# Altium PCB UpperAvi2.PcbDoc
Units mil, origin at the board's own origin, x right, y up, seen from the top; angles counter-clockwise.
Board outline 4760 x 3145 mil, 4 copper layers (Top Layer, Layer 1, Layer 2, Bottom Layer), stack 54.2 mil thick; 15 components, 5 nets, 37 pads, 3 vias.
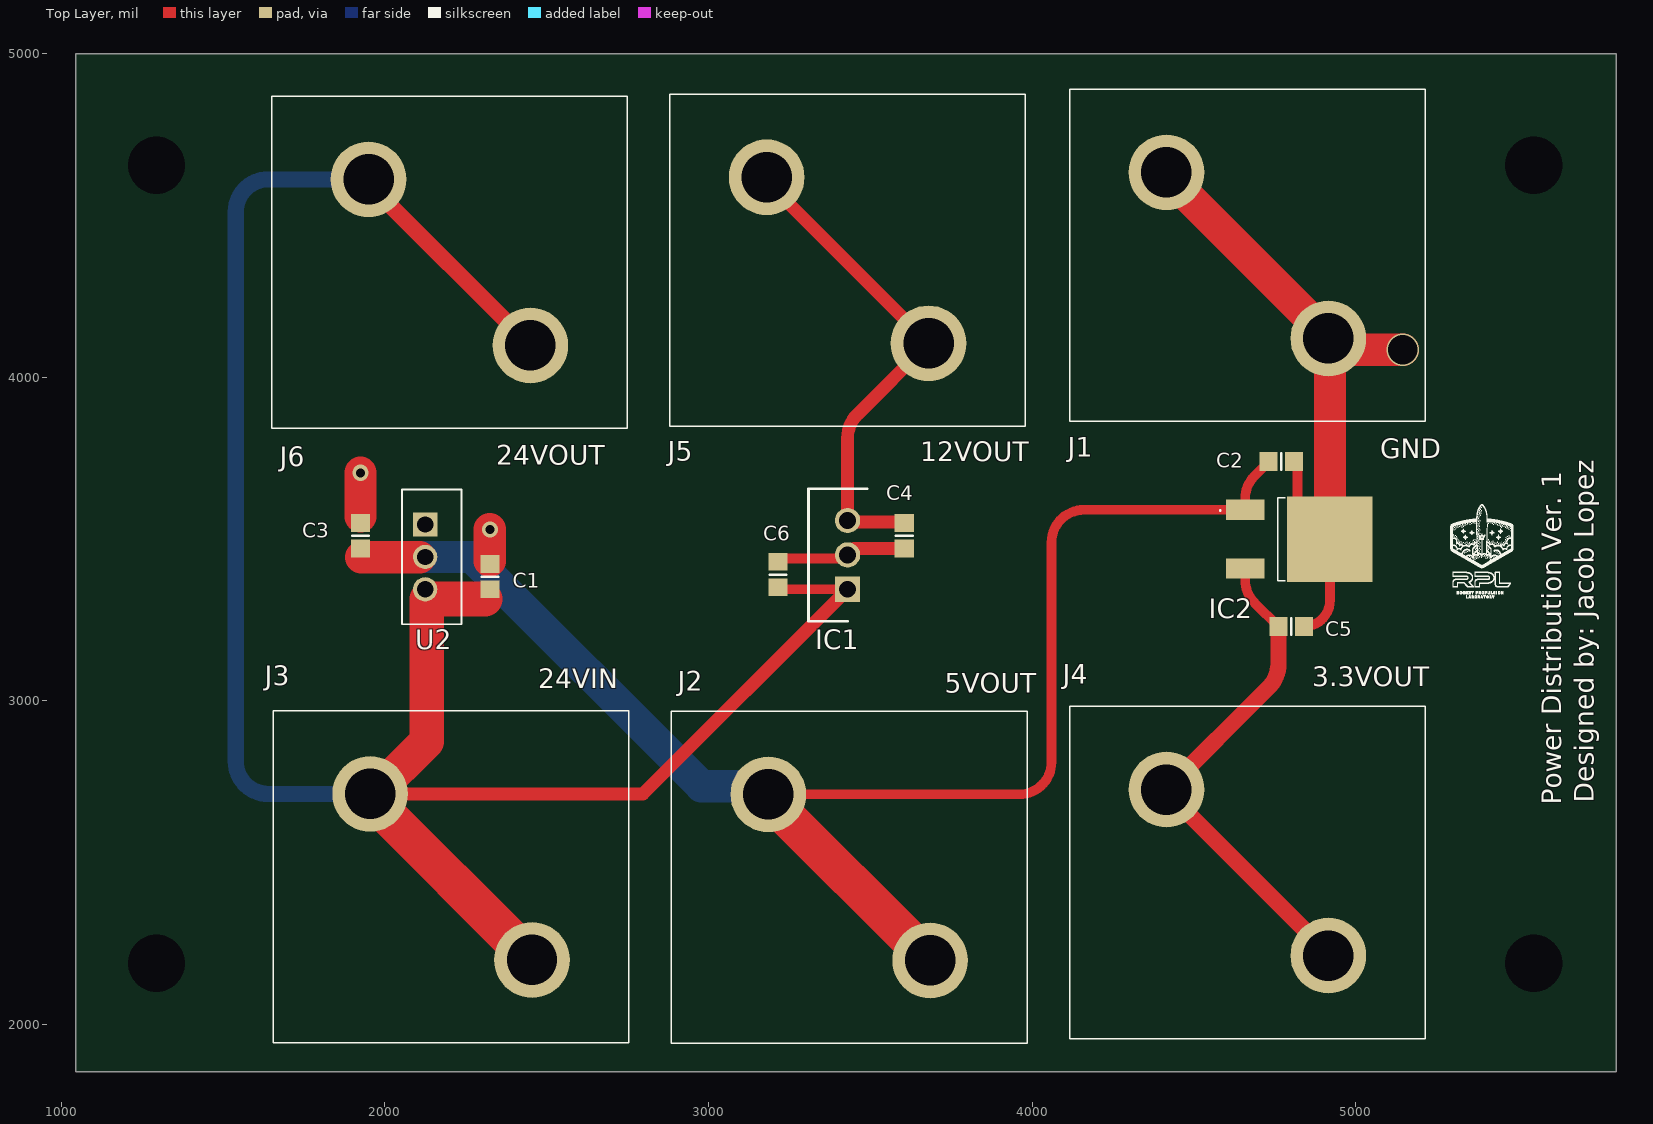
[diagram p0: Top Layer view]
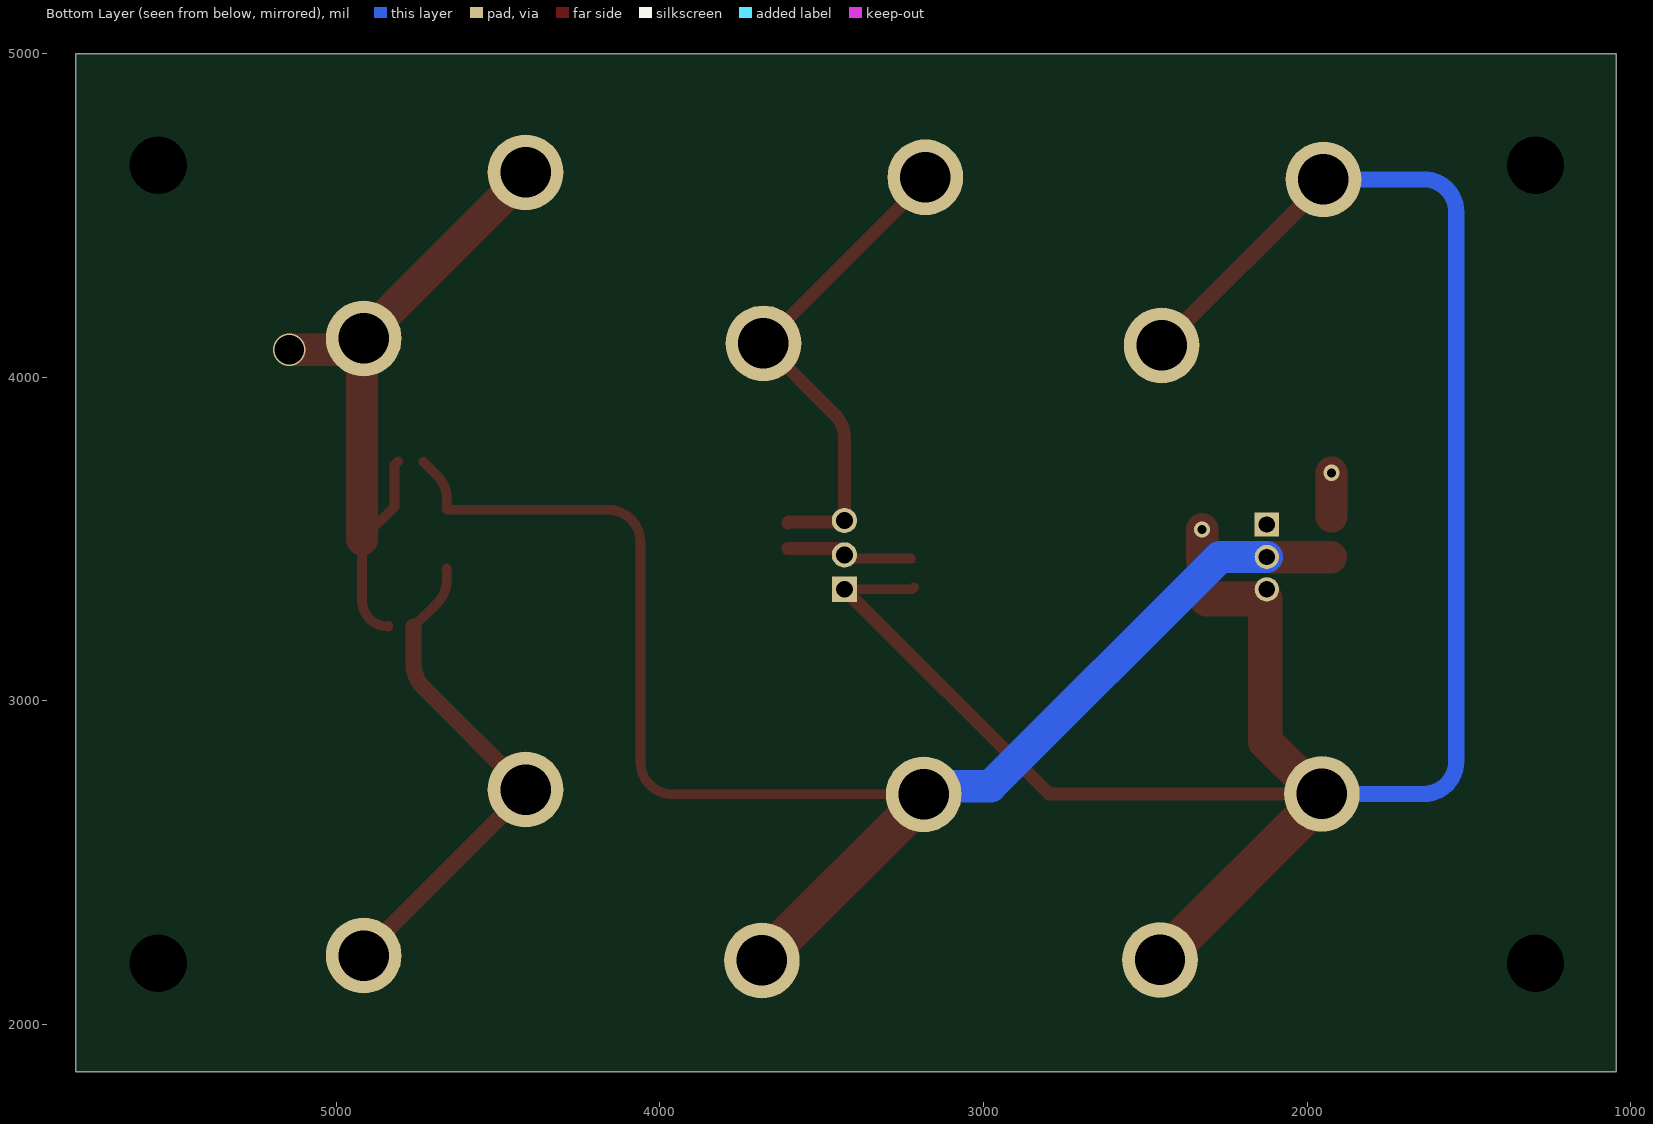
[diagram p1: Bottom Layer view, seen from below]
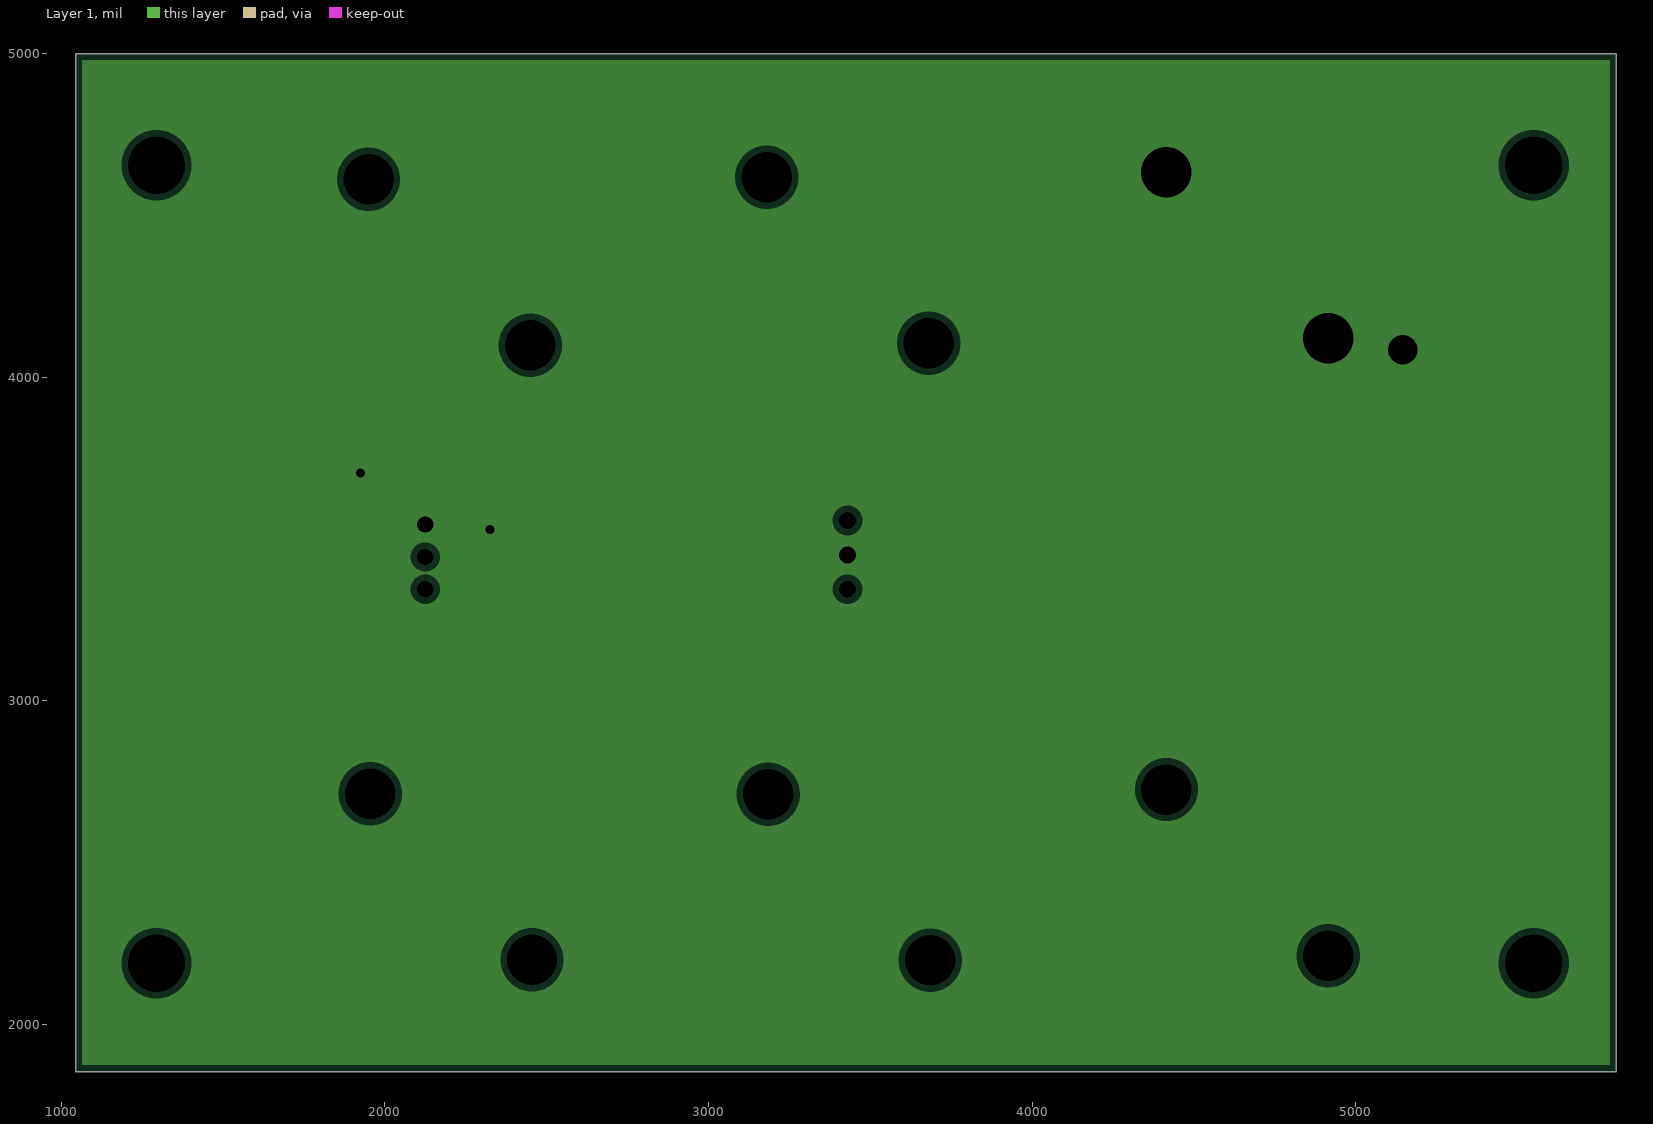
[diagram p2: Layer 1, clearances drawn from the general rule]
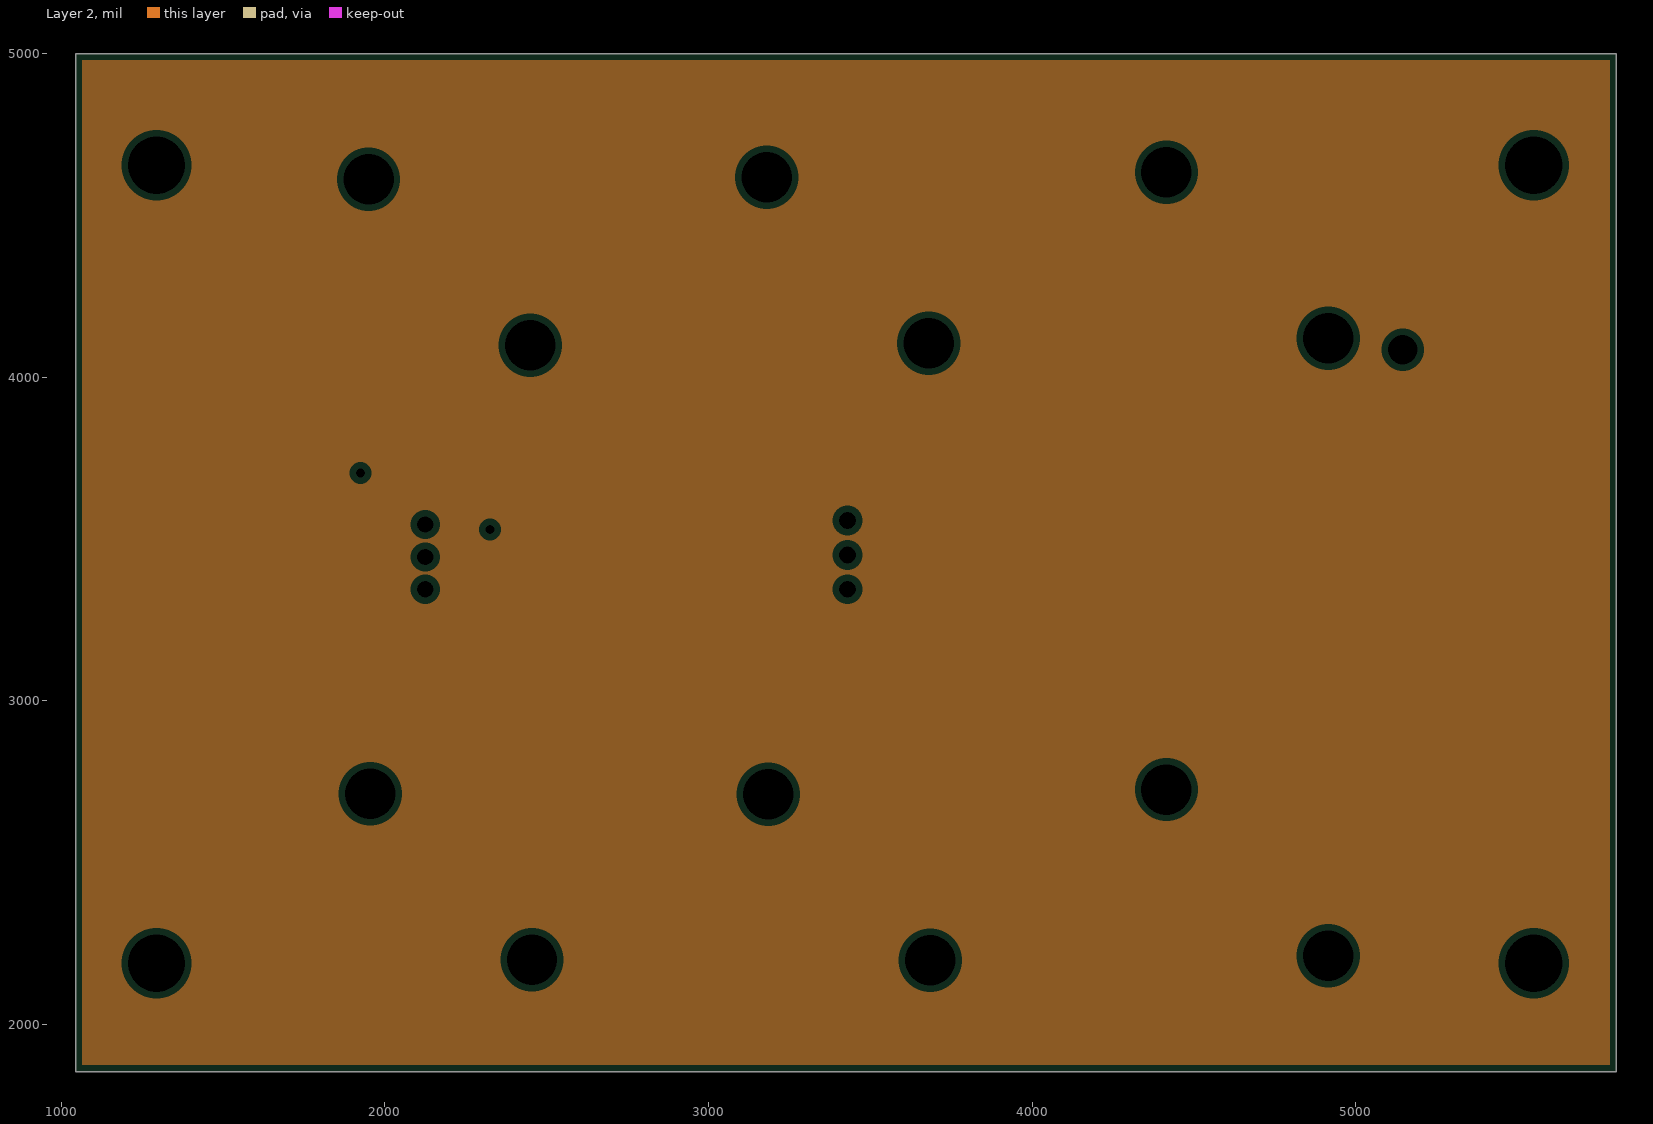
[diagram p3: Layer 2, clearances drawn from the general rule]

## Layer stack, top to bottom
Top Solder: solder mask 0.4, Solder Resist, Dk 3.5
Top Layer: signal copper 9
Dielectric 2: prepreg 2.8, PP-006, Dk 4.1
Layer 1: plane copper 9, net GND
Dielectric 1: dielectric 12.6, FR-4, Dk 4.8
Layer 2: plane copper 9
Dielectric 3: prepreg 2.8, PP-006, Dk 4.1
Bottom Layer: signal copper 9
Bottom Solder: solder mask 0.4, Solder Resist, Dk 3.5

## Board outline
1045,1855 5805,1855 5805,5000 1045,5000

## Design rules (kind name [scope] priority, off if disabled: settings)
Clearance [All] p1: gap=10 ignorepadtopadclearanceinfootprint=FALSE except(0: Arc-Hole Track-Hole SMDPad-Hole THPad-Hole Via-Hole Fill-Hole Poly-Hole Region-Hole Text-Hole)
PlaneClearance [All] p1: clearance=20
PlaneConnect [All] p1: planeconnectstyle=Relief reliefexpansion=20 reliefentries=4 reliefconductorwidth=10 reliefairgap=10
PolygonConnect [All] p1: connectstyle=Relief reliefconductorwidth=10 reliefentries=4 polygonreliefangle="90 Angle" airgapwidth=10
RoutingVias [All] p1: holewidth=28 width=50 viastyle="Through Hole" minholewidth=28 minwidth=50 maxholewidth=28 maxwidth=50
SolderMaskExpansion [All] p1: expansion=4
Width [All] p1: maxlimit=200 minlimit=10 preferedwidth=10 minimp=50.000000 maximp=50.000000 favimp=50.000000
28 further rules are at their usual default settings.

## Components (designator, comment, footprint, x,y, rotation, side; value= is the part's Value field where it differs from the comment)
C1 "10uF" 6-0805_M 2325,3384.33 r90 top
C2 ".1uF" 6-0805_M 4769.37,3740 r0 top
C3 "10uF" 6-0805_M 1925,3510 r90 top
C4 ".1uF" 6-0805_M 3605,3510 r270 top
C5 "2.2uF" 6-0805_M 4800,3230 r0 top
C6 ".33uF" 6-0805_M 3215,3390.63 r90 top
IC1 "L78S12CV-12" TO270P460X1020X2008-3P 3430,3344.96 r90 top
IC2 "LF33CDT-TRY" LD1117DT33 4789.09,3500 r180 top
J1 "038660-8802" 0386608802 4665,4376.5 r180 top
J2 "038660-8802" 0386608802 3435,2455 r0 top
J3 "038660-8802" 0386608802 2205,2456.5 r0 top
J4 "038660-8802" 0386608802 4665,2470 r180 top
J5 "038660-8802" 0386608802 3430,4361.5 r0 top
J6 "038660-8802" 0386608802 2200,4355 r0 top
U2 "LM1084IT-5.0" *TO254P470X1016X2222-3P 2165,3345 r270 top

## Footprints (in the part's own frame and the unit in brackets; to place one, negate y for a bottom-side part, rotate by r counter-clockwise, add the part's x,y. Pads: shape width x height; smd on the part's side, far side on the other; paste and mask are expansions set on the pad)
6-0805_M [mm] "Chip Resistor, Body 2.0x1.2mm, IPC Low Density"
  rect 1.4x1.5 smd: 1(-1,0) 2(1,0)
  silkscreen extent 0,-0.65 0,0.65, body extent -1.07,-0.7 1.07,0.7, height 0.7
0386608802 [mm]
  round 5.94 hole 3.96: 1(-6.35,6.515) 2(6.35,-6.515)
  silkscreen extent -13.95,-13.03 13.95,13.03, body extent -13.95,-13.03 13.95,13.03, height 21
*TO254P470X1016X2222-3P [mil]
  rect 75x75 hole 50: 1(-200,-40)
  round 75 hole 50: 2(-100,-40) 3(0,-40)
  silkscreen extent -308,-112 108,72
LD1117DT33 [mm]
  rect 3x1.6 smd: 1(3.325,-2.3) 2(3.325,2.3)
  rect 6.7x6.7 smd: 3(-3.325,0)
  silkscreen extent 0.18,-3.25 5.32,3.25
TO270P460X1020X2008-3P [mm]
  rect 1.98x1.98 hole 1.32: 1(0,0)
  round 1.98 hole 1.32: 2(2.7,0) 3(5.4,0)
  silkscreen extent -2.5,-1.53 7.9,3.07, body extent -2.4,-1.53 7.8,3.07, height 19.21

## Part data
C1 C2 C3 C4 C5 C6: library part CC0603KRX7R9BB104, "0603 0.1 uF 50 V ±10 % Tolerance X7R SMT Multilayer Ceramic Capacitor", Package="0603 Yageo", Availability=Unavailable, MF=Yageo, MP=CC0603KRX7R9BB104, Price=None, SnapEDA_Link=https://www.snapeda.com/parts/CC0603KRX7R9BB104/Yageo/view-part/?ref=snap
IC1: library part L78S12CV, "Integrated Circuit", Manufacturer_Name=STMicroelectronics, Mouser Part Number=511-L78S12CV, Datasheet Link=https://componentsearchengine.com/Datasheets/1/L78S12CV.pdf, Height=4.6mm, Manufacturer_Part_Number=L78S12CV, Mouser Price/Stock=https://www.mouser.com/Search/Refine.aspx?Keyword=511-L78S12CV
IC2: "Integrated Circuit", Manufacturer_Name=STMicroelectronics, Mouser Part Number=511-LF33CDT-TRY, Datasheet Link=https://componentsearchengine.com/Datasheets/1/LF33CDT-TRY.pdf, Height=2mm, Manufacturer_Part_Number=LF33CDT-TRY, Mouser Price/Stock=https://www.mouser.com/Search/Refine.aspx?Keyword=511-LF33CDT-TRY
J1 J2 J3 J4 J5 J6: "Connector", Manufacturer_Name=Molex, Datasheet Link=https://www.molex.com/pdm_docs/sd/386608802_sd.pdf, Height=21mm, Manufacturer_Part_Number=038660-8802
U2: "Voltage stabiliser; LDO, fixed; 5V; 5A; TO220; THT; 1.2", Package="TO-220 Texas Instruments", Availability=Unavailable, MF="Texas Instruments", MP=LM1084IT-5.0/NOPB, Price=None, SnapEDA_Link=https://www.snapeda.com/parts/LM1084IT-5.0/NOPB/Texas%20Instruments/view-part/?ref=snap

## Free pads (board coordinates)
  round 60 hole 177.16: 2(1295,2190) 2(1295,4655) 2(5550,2190) 2(5550,4655)

## Via types
v1: diameter 50, hole 28, Top Layer to Bottom Layer, 2 vias
v2: diameter 100, hole 90, Top Layer to Bottom Layer, 1 vias

## Nets (pads, with @x,y where several pads share a name; then routed paths per layer and width w, separated by ;. In a path a pad name is that pad's centre, name@x,y a point inside that pad or via, vN(x,y) a via of type N, cw(c..) or ccw(c..) an arc to the next point about the centre after c; other vN are vias at no path point)
3.3VOUT: C5.1 IC2.2 J4.1 J4.2 | length 1592.4
  Top Layer w10: IC2.2 IC2.2@4670.55,3409.45
  Top Layer w30: J4.2@4415,2720 J4.2 ; IC2.2 4658.19,3373.86 ccw(c4758.19,3373.86) 4687.48,3303.15 C5.1 ; J4.1 J4.1@4915,2220
  Top Layer w50: J4.2@4415,2720 J4.1@4915,2220 ; J4.2 4731.34,3042.84 ccw(c4660.63,3113.55) 4760.63,3113.55 C5.1
5VOUT: C2.1 C3.1 IC2.1 J2.1 J2.2 U2.2 | length 4705.2
  Top Layer w10: C2.1@4730,3738.03 C2.1
  Top Layer w30: J2.1@3185,2698.5 J2.1 3960,2711.5 ccw(c3960,2811.5) 4060,2811.5 4060,3490.55 cw(c4160,3490.55) 4160,3590.55 IC2.1 4658.19,3624.8 cw(c4758.19,3624.8) 4687.48,3695.51 C2.1@4730,3738.03
  Top Layer w100: C3.1@1927.99,3444.45 U2.2@2107.99,3444.45
  Top Layer w120: J2.1@3185,2698.5 J2.2
  Bottom Layer w100: U2.2 2270.14,3445 2978.03,2737.11 3159.39,2737.11 J2.1
12VOUT: C4.1 IC1.3 J5.1 J5.2 | length 1525
  Top Layer w40: J5.1 3180,4605 J5.2 3459.29,3884.29 ccw(c3530,3813.58) 3430,3813.58 IC1.3 ; IC1.3@3448.46,3553.46 3600.91,3553.46 C4.1
GND: C1.2 C2.2 C3.2 C4.2 C5.2 C6.2 IC1.2 IC2.3 J1.1 J1.2 U2.1 | length 2803.1
  Top Layer w10: C6.2 C6.2@3225,3440
  Top Layer w30: C6.2@3225,3440 3418.74,3440 IC1.2 ; J1.2@4480,4560 J1.2@4480,4632.99 ; C2.2 4820,3728.74 4820,3600 IC2.3 4920,3310.63 cw(c4839.37,3310.63) C5.2 C5.2@4839.37,3231.97 ; J1.1 J1.1@4920,4115 ; J1.1@4920,4120 J1.1@4920,4115 ; J1.1@4950,4085 J1.1@4920,4115
  Top Layer w40: IC1.2 3449.37,3470.63 C4.2
  Top Layer w100: C3.2@1925,3570 v1(1925,3705) ; C1.2@2325,3432.52 v1(2325,3530) ; J1.2@4480,4560 J1.1@4920,4120 ; IC2.3 J1.1@4920,4115 ; J1.1@4950,4085 v2(5145,4085)
Input24V: C1.1 C6.1 IC1.1 J3.1 J3.2 J6.1 J6.2 U2.3 | length 6894.3
  Top Layer w30: J3.1@1955,2700 J3.1 ; C6.1 3221.3,3344.96 IC1.1
  Top Layer w40: J3.1@1967.99,2712.99 2798.03,2712.99 IC1.1
  Top Layer w50: J6.1 1950,4598.5 J6.2
  Top Layer w107: J3.1 1967.99,2712.99 2130,2875 2130,3315 2310,3315
  Top Layer w120: J3.1@1955,2700 J3.2
  Bottom Layer w50: J6.1@1950,4598.5 J6.1 1640,4611.5 ccw(c1640,4511.5) 1540,4511.5 1540,2812.99 ccw(c1640,2812.99) 1640,2712.99 J3.1

## Polygon pours and split planes (outlines as drawn)
GND on Layer 1 (split plane): 5784.9,1875.1 1065.1,1875.1 1065.1,4979.9 5784.9,4979.9
no net on Layer 2 (split plane): 5784.9,1875.1 1065.1,1875.1 1065.1,4979.9 5784.9,4979.9

## Silkscreen, mask and mechanical layers (free items; w line width, h text height)
Top Overlay:
  drawing of 9120 lines, arcs and shapes, not listed
  text "GND" at 5075,3750 h60
  text "12VOUT" at 3655,3740 h60
  text "24VOUT" at 2345,3730 h60
  text "3.3VOUT" at 4865,3045 h60
  text "24VIN" at 2475,3040 h60
  text "5VOUT" at 3730,3025 h60
  text "Designed by: Jacob Lopez" at 5735,2685 h60 r90
  text "Power Distribution Ver. 1" at 5635,2680 h60 r90